# EAGLE board Controller (EAGLE 6.4)
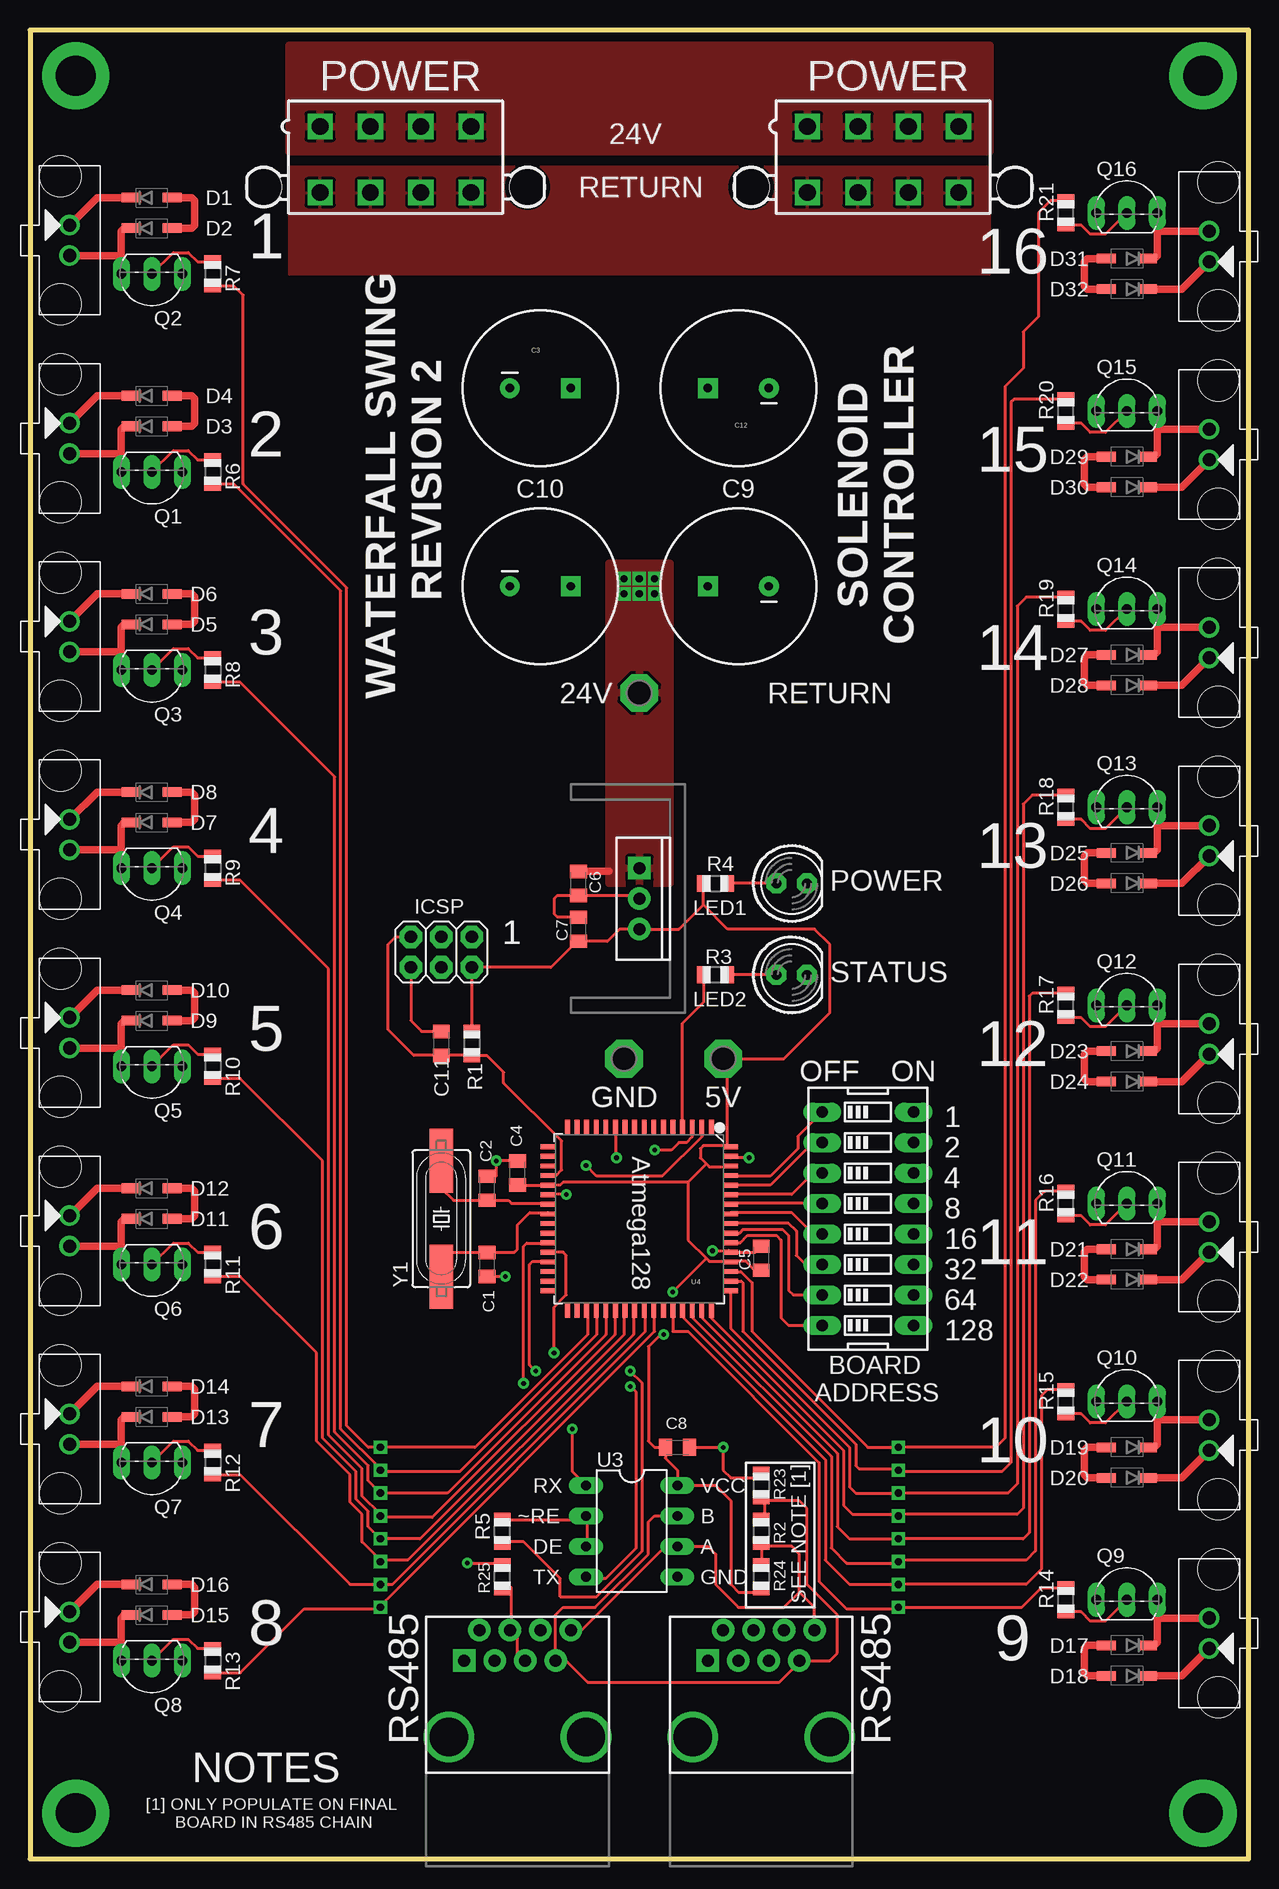
[diagram p0: board, top side]
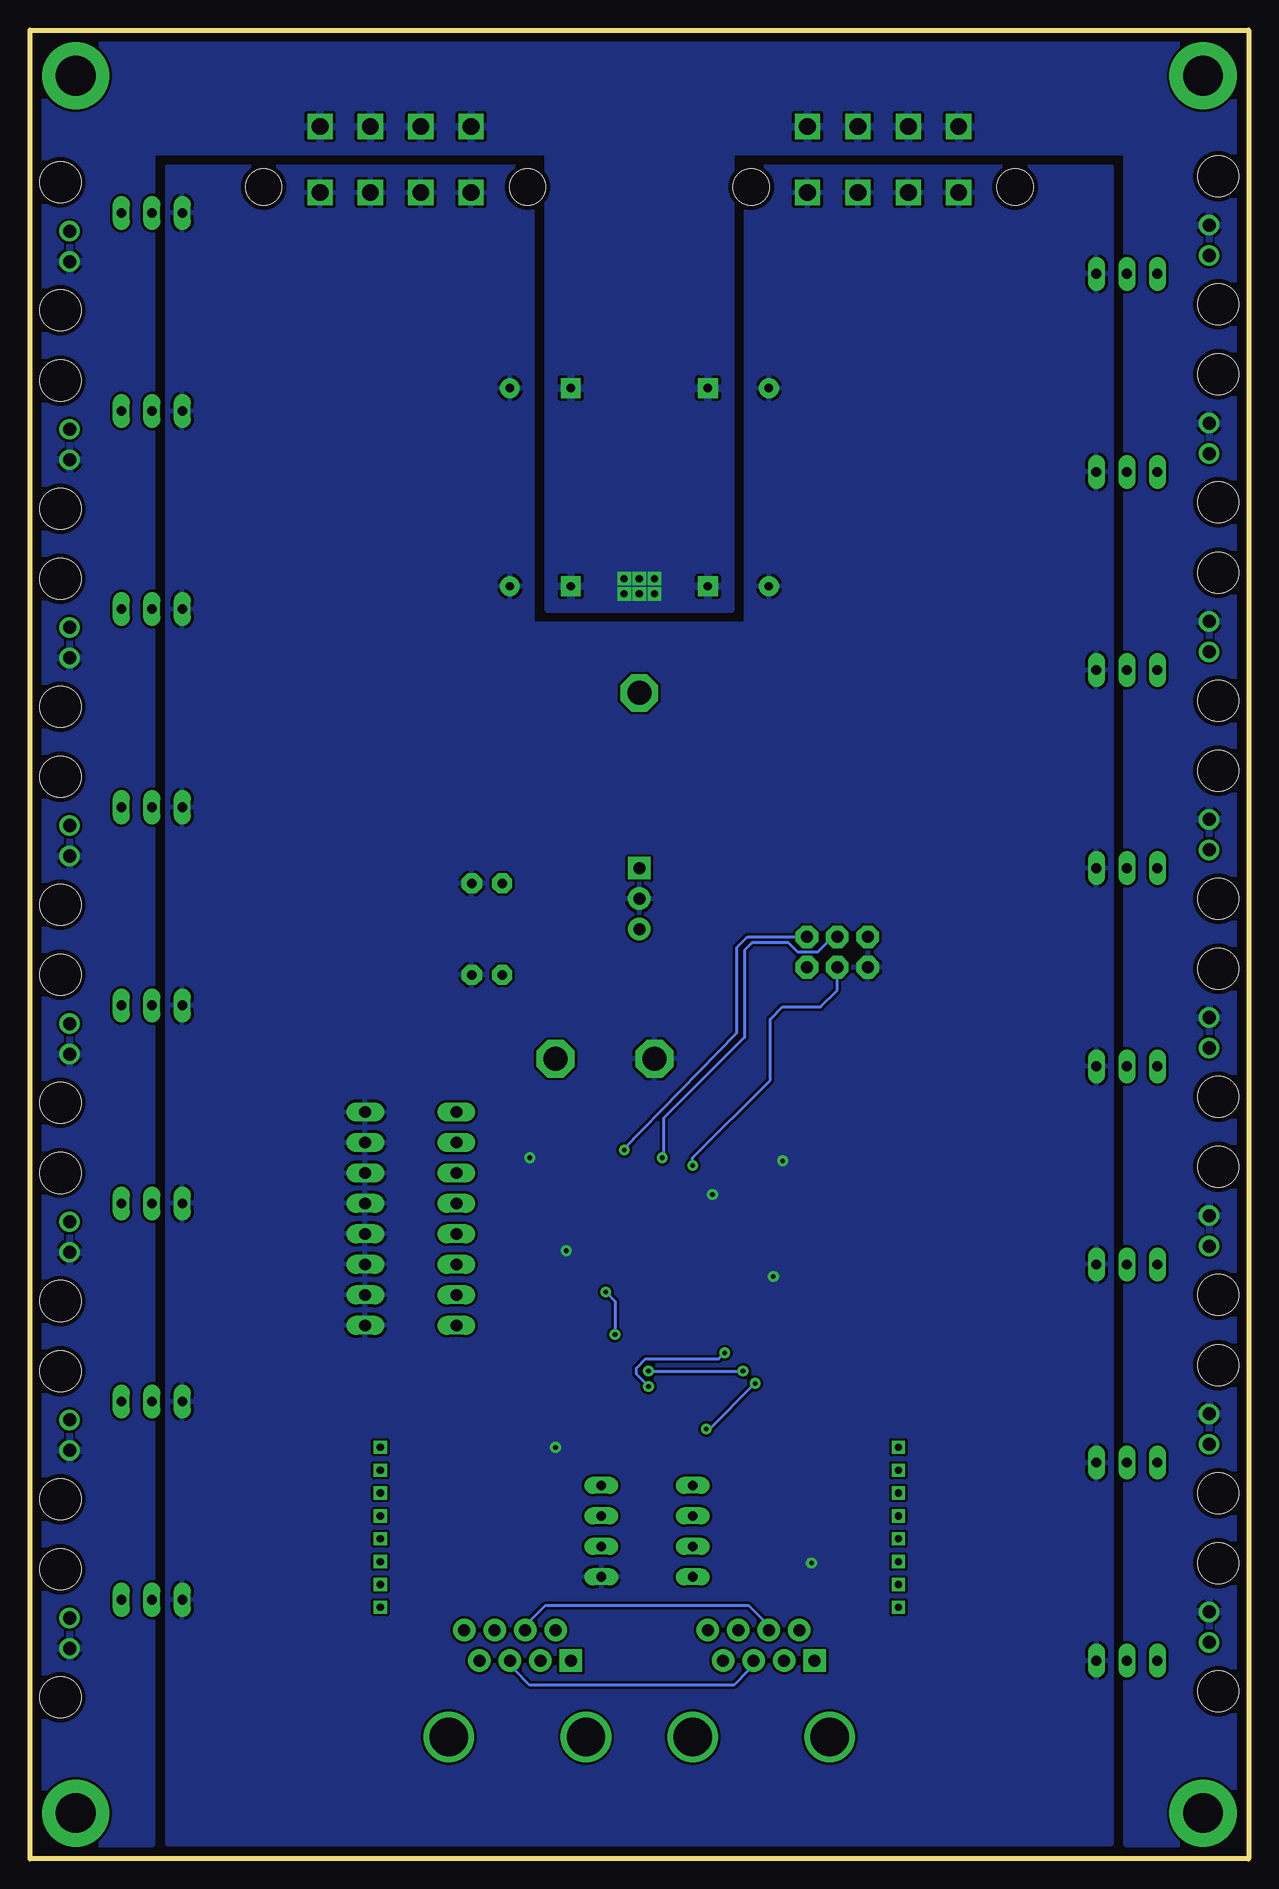
[diagram p1: board, bottom side, seen from below]

Size 101.6 x 152.4 mm. Coordinates in mm from the lower left corner, seen from the top.
Outline: 0,0 101.6,0 101.6,152.4 0,152.4 0,0
Copper layers (1*16): Top 0.035mm / dielectric 1.5mm / Bottom 0.035mm
Design rules "icc-4pcb": minimum track width 10mil, minimum drill 15mil, track to track 8mil, track to pad 8mil, pad to pad 8mil, via to via 8mil, smd to smd 8mil, copper to edge 15mil, drill to drill 8mil, minimum pad ring 12mil, minimum via ring 10mil, stop-mask expansion 4mil, vias tented up to drill 0mil, thermal gap 10mil
Net classes: 0 default: width 0.203 mm; 1 Power: width 0.635 mm

## Footprints (pad centres in the part's own frame; a part is rotated, then mirrored left to right if it is on the bottom)
C0805K = smd 1.1 x 1.4: 1 -1,0; 2 1,0
CPOL-RADIAL-1000UF-35V = drill 0.7 pad 1.651 square: 1 2.54,0 | drill 0.7 pad 1.651: 2 -2.54,0
SOD123 = smd 1.6 x 0.8: 1 -1.7,0; 2 1.7,0
2X03 = drill 1.016 pad 1.88 octagon: 1 -2.54,-1.27; 2 -2.54,1.27; 3 0,-1.27; 4 0,1.27; 5 2.54,-1.27; 6 2.54,1.27
RJ45-8 = drill 1 pad 1.88 square: 1 -4.445,6.35 | drill 1 pad 1.88: 2 -3.175,8.89; 3 -1.905,6.35; 4 -0.635,8.89; 5 0.635,6.35; 6 1.905,8.89; 7 3.175,6.35; 8 4.445,8.89 | drill 3.2 pad 3.556: P$2 -5.715,0; P$3 5.715,0
MOLEX-70545-02POSITION = drill 1.092: P1 6.604,-0.762; P2 4.064,-0.762 | hole 3.404: 0,0; 10.668,0
STAND-OFF = drill 3.302 pad 5.588: P$1 0,0
LED5MM = drill 0.813 pad 1.676 octagon: A -1.27,0; K 1.27,0
TO92-EBC = drill 0.813 long: B 0,-1.27; C 2.54,-1.27; E -2.54,-1.27
R0805 = smd 1.1 x 1.4: 1 -1,0; 2 1,0
DIPSWITCH-08 = drill 0.97 long: 1 -8.89,-3.81; 2 -6.35,-3.81; 3 -3.81,-3.81; 4 -1.27,-3.81; 5 1.27,-3.81; 6 3.81,-3.81; 7 6.35,-3.81; 8 8.89,-3.81; 9 8.89,3.81; 10 6.35,3.81; 11 3.81,3.81; 12 1.27,3.81; 13 -1.27,3.81; 14 -3.81,3.81; 15 -6.35,3.81; 16 -8.89,3.81
P1-20 = drill 2.007 pad 3.15 octagon: TP 0,0
TO220-IGO = drill 1 pad 1.88: GND 0,0; OUT 2.54,0 | drill 1 pad 1.88 square: IN -2.54,0
DIL08 = drill 0.813 long: 1 -3.81,-3.81; 2 -1.27,-3.81; 3 1.27,-3.81; 4 3.81,-3.81; 5 3.81,3.81; 6 1.27,3.81; 7 -1.27,3.81; 8 -3.81,3.81
TQFP64_14X14MM = smd 0.4 x 1.27: 1 -6,-7.6; 2 -5.2,-7.6; 3 -4.4,-7.6; 4 -3.6,-7.6; 5 -2.8,-7.6; 6 -2,-7.6; 7 -1.2,-7.6; 8 -0.4,-7.6; 9 0.4,-7.6; 10 1.2,-7.6; 11 2,-7.6; 12 2.8,-7.6; 13 3.6,-7.6; 14 4.4,-7.6; 15 5.2,-7.6; 16 6,-7.6; 33 6,7.6; 34 5.2,7.6; 35 4.4,7.6; 36 3.6,7.6; 37 2.8,7.6; 38 2,7.6; 39 1.2,7.6; 40 0.4,7.6; 41 -0.4,7.6; 42 -1.2,7.6; 43 -2,7.6; 44 -2.8,7.6; 45 -3.6,7.6; 46 -4.4,7.6; 47 -5.2,7.6; 48 -6,7.6 | smd 1.27 x 0.4: 17 7.6,-6; 18 7.6,-5.2; 19 7.6,-4.4; 20 7.6,-3.6; 21 7.6,-2.8; 22 7.6,-2; 23 7.6,-1.2; 24 7.6,-0.4; 25 7.6,0.4; 26 7.6,1.2; 27 7.6,2; 28 7.6,2.8; 29 7.6,3.6; 30 7.6,4.4; 31 7.6,5.2; 32 7.6,6; 49 -7.6,6; 50 -7.6,5.2; 51 -7.6,4.4; 52 -7.6,3.6; 53 -7.6,2.8; 54 -7.6,2; 55 -7.6,1.2; 56 -7.6,0.4; 57 -7.6,-0.4; 58 -7.6,-1.2; 59 -7.6,-2; 60 -7.6,-2.8; 61 -7.6,-3.6; 62 -7.6,-4.4; 63 -7.6,-5.2; 64 -7.6,-6
5566-8 = drill 1.4 square: 1 6.3,-2.75; 2 2.1,-2.75; 3 -2.1,-2.75; 4 -6.3,-2.75; 5 6.3,2.75; 6 2.1,2.75; 7 -2.1,2.75; 8 -6.3,2.75 | hole 3: 11,2.29; -11,2.29
HC49UP = smd 5.334 x 1.93: 1 -4.826,0; 2 4.826,0

## Placement (x,y rotation side)
C1  33p  [C0805K]  38.1,49.53 270 top
C2  33p  [C0805K]  38.1,55.88 90 top
C3  1000u  [CPOL-RADIAL-1000UF-35V]  42.55,122.56 0 top
C4  .1u  [C0805K]  40.64,57.15 90 top
C5  .1u  [C0805K]  60.96,50.04 90 top
C6  15uF, 25V  [C0805K]  45.72,81.28 270 top
C7  15uF, 25V  [C0805K]  45.72,77.47 90 top
C8  .1u  [C0805K]  53.98,34.29 0 top
C9  1000u  [CPOL-RADIAL-1000UF-35V]  59.05,106.05 180 top
C10  1000u  [CPOL-RADIAL-1000UF-35V]  42.55,106.05 0 top
C11  .1u  [C0805K]  34.29,67.94 90 top
C12  1000u  [CPOL-RADIAL-1000UF-35V]  59.05,122.56 180 top
D1  [SOD123]  10.16,138.43 0 top
D2  [SOD123]  10.16,135.89 0 top
D3  [SOD123]  10.16,119.38 0 top
D4  [SOD123]  10.16,121.92 0 top
D5  [SOD123]  10.16,102.87 0 top
D6  [SOD123]  10.16,105.41 0 top
D7  [SOD123]  10.16,86.36 0 top
D8  [SOD123]  10.16,88.9 0 top
D9  [SOD123]  10.16,69.85 0 top
D10  [SOD123]  10.16,72.39 0 top
D11  [SOD123]  10.16,53.34 0 top
D12  [SOD123]  10.16,55.88 0 top
D13  [SOD123]  10.16,36.83 0 top
D14  [SOD123]  10.16,39.37 0 top
D15  [SOD123]  10.16,20.32 0 top
D16  [SOD123]  10.16,22.86 0 top
D17  [SOD123]  91.44,17.78 180 top
D18  [SOD123]  91.44,15.24 180 top
D19  [SOD123]  91.44,34.29 180 top
D20  [SOD123]  91.44,31.75 180 top
D21  [SOD123]  91.44,50.8 180 top
D22  [SOD123]  91.44,48.26 180 top
D23  [SOD123]  91.44,67.31 180 top
D24  [SOD123]  91.44,64.77 180 top
D25  [SOD123]  91.44,83.82 180 top
D26  [SOD123]  91.44,81.28 180 top
D27  [SOD123]  91.44,100.33 180 top
D28  [SOD123]  91.44,97.79 180 top
D29  [SOD123]  91.44,116.84 180 top
D30  [SOD123]  91.44,114.3 180 top
D31  [SOD123]  91.44,133.35 180 top
D32  [SOD123]  91.44,130.81 180 top
ICSP  [2X03]  34.29,75.56 180 top
J1  RJ45-8PTH  [RJ45-8]  40.64,10.16 0 top
J2  RJ45-8PTH  [RJ45-8]  60.96,10.16 0 top
J3  MOLEX-70545-02POSITION  [MOLEX-70545-02POSITION]  2.54,129.54 90 top
J4  MOLEX-70545-02POSITION  [MOLEX-70545-02POSITION]  2.54,113.03 90 top
J5  MOLEX-70545-02POSITION  [MOLEX-70545-02POSITION]  2.54,96.52 90 top
J6  MOLEX-70545-02POSITION  [MOLEX-70545-02POSITION]  2.54,80.01 90 top
J7  MOLEX-70545-02POSITION  [MOLEX-70545-02POSITION]  2.54,63.5 90 top
J8  MOLEX-70545-02POSITION  [MOLEX-70545-02POSITION]  2.54,46.99 90 top
J9  MOLEX-70545-02POSITION  [MOLEX-70545-02POSITION]  2.54,30.48 90 top
J10  MOLEX-70545-02POSITION  [MOLEX-70545-02POSITION]  2.54,13.97 90 top
J11  MOLEX-70545-02POSITION  [MOLEX-70545-02POSITION]  99.06,24.13 270 top
J12  MOLEX-70545-02POSITION  [MOLEX-70545-02POSITION]  99.06,40.64 270 top
J15  MOLEX-70545-02POSITION  [MOLEX-70545-02POSITION]  99.06,57.15 270 top
J16  MOLEX-70545-02POSITION  [MOLEX-70545-02POSITION]  99.06,73.66 270 top
J17  MOLEX-70545-02POSITION  [MOLEX-70545-02POSITION]  99.06,90.17 270 top
J18  MOLEX-70545-02POSITION  [MOLEX-70545-02POSITION]  99.06,106.68 270 top
J19  MOLEX-70545-02POSITION  [MOLEX-70545-02POSITION]  99.06,123.19 270 top
J20  MOLEX-70545-02POSITION  [MOLEX-70545-02POSITION]  99.06,139.7 270 top
JP1  STAND-OFF  [STAND-OFF]  97.79,3.81 0 top
JP2  STAND-OFF  [STAND-OFF]  3.81,3.81 0 top
JP3  STAND-OFF  [STAND-OFF]  97.79,148.59 0 top
JP4  STAND-OFF  [STAND-OFF]  3.81,148.59 0 top
LED1  [LED5MM]  63.5,81.28 0 top
LED2  [LED5MM]  63.5,73.66 0 top
Q1  [TO92-EBC]  10.16,114.3 180 top
Q2  MPSA27  [TO92-EBC]  10.16,130.81 180 top
Q3  [TO92-EBC]  10.16,97.79 180 top
Q4  [TO92-EBC]  10.16,81.28 180 top
Q5  [TO92-EBC]  10.16,64.77 180 top
Q6  [TO92-EBC]  10.16,48.26 180 top
Q7  [TO92-EBC]  10.16,31.75 180 top
Q8  [TO92-EBC]  10.16,15.24 180 top
Q9  [TO92-EBC]  91.44,22.86 0 top
Q10  [TO92-EBC]  91.44,39.37 0 top
Q11  [TO92-EBC]  91.44,55.88 0 top
Q12  [TO92-EBC]  91.44,72.39 0 top
Q13  [TO92-EBC]  91.44,88.9 0 top
Q14  [TO92-EBC]  91.44,105.41 0 top
Q15  [TO92-EBC]  91.44,121.92 0 top
Q16  [TO92-EBC]  91.44,138.43 0 top
R1  10k  [R0805]  36.83,67.94 270 top
R2  120  [R0805]  60.96,27.3 270 top
R3  1k  [R0805]  57.15,73.66 180 top
R4  1k  [R0805]  57.15,81.28 0 top
R5  1k  [R0805]  39.37,27.3 90 top
R6  10k  [R0805]  15.24,115.57 270 top
R7  10k  [R0805]  15.24,132.08 270 top
R8  10k  [R0805]  15.24,99.06 270 top
R9  10k  [R0805]  15.24,82.55 270 top
R10  10k  [R0805]  15.24,66.04 270 top
R11  10k  [R0805]  15.24,49.53 270 top
R12  10k  [R0805]  15.24,33.02 270 top
R13  10k  [R0805]  15.24,16.51 270 top
R14  10k  [R0805]  86.36,21.59 90 top
R15  10k  [R0805]  86.36,38.1 90 top
R16  10k  [R0805]  86.36,54.61 90 top
R17  10k  [R0805]  86.36,71.12 90 top
R18  10k  [R0805]  86.36,87.63 90 top
R19  10k  [R0805]  86.36,104.14 90 top
R20  10k  [R0805]  86.36,120.65 90 top
R21  10k  [R0805]  86.36,137.16 90 top
R23  560  [R0805]  60.96,31.11 270 top
R24  560  [R0805]  60.96,23.5 270 top
R25  0  [R0805]  39.37,23.5 90 top
SW1  [DIPSWITCH-08]  69.85,53.34 270 top
TP1  PTR1PAD1-20  [P1-20]  50.8,97.16 0 top
TP3  PTR1PAD1-20  [P1-20]  57.78,66.67 0 top
TP4  PTR1PAD1-20  [P1-20]  49.53,66.67 0 top
U2  7805  [TO220-IGO]  50.8,80.01 270 top
U3  SN75176BP  [DIL08]  50.16,27.3 270 top
U4  ATMEGA128-SMD  [TQFP64_14X14MM]  50.8,53.34 180 top
X3  5566-8  [5566-8]  30.48,141.6 180 top
X4  5566-8  [5566-8]  71.12,141.6 180 top
Y1  16MHz  [HC49UP]  34.29,53.34 90 top

## Library data of the parts
C1 C2 C4-C8 C11 LED1 LED2 R1-R21 R23-R25 = adafruit
C3 C9 C10 C12 J1 J2 JP1-JP4 U3 = custom
D1-D32 = semicon-smd-ipc
ICSP U2 = SparkFun
J3-J12 J15-J20 = icc
Q1-Q16 = transistor-neu-to92
SW1 = SparkFun-Electromechanical
TP1 TP3 TP4 = testpad
U4 = SparkFun-DigitalIC
X3 X4 = con-molex; OC_FARNELL: unknown; OC_NEWARK: unknown
Y1 = crystal

## Nets
5V: C4.1 C5.1 C7.1 C8.1 ICSP.2 R1.1 R4.1 R24.2 TP3.TP U2.OUT U3.8 U4.21 U4.52 U4.62 U4.64
A: J1.8 J2.8 R2.2 R24.1 U3.6
B: J1.7 J2.7 R2.1 R23.2 U3.7
GND: C1.2 C2.2 C3.2 C4.2 C5.2 C6.2 C7.2 C8.2 C9.2 C10.2 C11.2 C12.2 ICSP.6 LED1.K LED2.K Q1.E Q2.E Q3.E Q4.E Q5.E Q6.E Q7.E Q8.E Q9.E Q10.E Q11.E Q12.E Q13.E Q14.E Q15.E Q16.E R23.1 R25.2 SW1.9 SW1.10 SW1.11 SW1.12 SW1.13 SW1.14 SW1.15 SW1.16 TP4.TP U2.GND U3.5 U4.22 U4.53 U4.63 X3.5 X3.6 X3.7 X3.8 X4.5 X4.6 X4.7 X4.8
MISO: ICSP.1 U4.3
MOSI: ICSP.4 U4.2
N$1: U3.1 U4.27
N$3: R3.2 U4.4
N$4: U3.4 U4.28
N$5: C2.1 U4.23 Y1.2
N$6: C1.1 U4.24 Y1.1
N$7: LED1.A R4.2
N$8: LED2.A R3.1
N$9: Q1.B R6.1
N$11: Q2.B R7.1
N$12: R5.2 U3.2 U3.3
N$13 [Power]: D3.1 J4.P2 Q1.C
N$14 [Power]: D2.1 J3.P2 Q2.C
N$16 [Power]: D9.2 D10.2
N$17 [Power]: D1.2 D2.2
N$18: Q3.B R8.1
N$19 [Power]: D5.1 J5.P2 Q3.C
N$20 [Power]: D17.2 D18.2
N$21: Q4.B R9.1
N$22 [Power]: D7.1 J6.P2 Q4.C
N$23 [Power]: D25.2 D26.2
N$24: Q5.B R10.1
N$25 [Power]: D9.1 J7.P2 Q5.C
N$26 [Power]: D27.2 D28.2
N$27: Q6.B R11.1
N$28 [Power]: D11.1 J8.P2 Q6.C
N$29 [Power]: D19.2 D20.2
N$30: Q7.B R12.1
N$31 [Power]: D13.1 J9.P2 Q7.C
N$32 [Power]: D11.2 D12.2
N$33: Q8.B R13.1
N$34 [Power]: D15.1 J10.P2 Q8.C
N$35 [Power]: D3.2 D4.2
N$36: Q9.B R14.1
N$37 [Power]: D17.1 J11.P2 Q9.C
N$38 [Power]: D5.2 D6.2
N$39: Q10.B R15.1
N$40 [Power]: D19.1 J12.P2 Q10.C
N$41 [Power]: D13.2 D14.2
N$42: Q11.B R16.1
N$43 [Power]: D21.1 J15.P2 Q11.C
N$44 [Power]: D21.2 D22.2
N$45: Q12.B R17.1
N$46 [Power]: D23.1 J16.P2 Q12.C
N$47 [Power]: D29.2 D30.2
N$48: Q13.B R18.1
N$49 [Power]: D25.1 J17.P2 Q13.C
N$50 [Power]: D31.2 D32.2
N$51: Q14.B R19.1
N$52 [Power]: D27.1 J18.P2 Q14.C
N$53 [Power]: D23.2 D24.2
N$54: Q15.B R20.1
N$55 [Power]: D29.1 J19.P2 Q15.C
N$56 [Power]: D15.2 D16.2
N$57: Q16.B R21.1
N$58 [Power]: D31.1 J20.P2 Q16.C
N$59 [Power]: D7.2 D8.2
N$60: J1.4 J1.5 J2.4 J2.5 R25.1
N$61: SW1.1 U4.61
N$62: SW1.2 U4.60
N$63: SW1.3 U4.59
N$64: SW1.4 U4.58
N$65: SW1.5 U4.57
N$66: SW1.6 U4.56
N$67: SW1.7 U4.55
N$68: SW1.8 U4.54
N$70: R5.1 U4.29
NRESET: C11.1 ICSP.5 R1.2 U4.20
SCK: ICSP.3 U4.11
V+ [Power]: C3.1 C6.1 C9.1 C10.1 C12.1 D1.1 D4.1 D6.1 D8.1 D10.1 D12.1 D14.1 D16.1 D18.1 D20.1 D22.1 D24.1 D26.1 D28.1 D30.1 D32.1 J3.P1 J4.P1 J5.P1 J6.P1 J7.P1 J8.P1 J9.P1 J10.P1 J11.P1 J12.P1 J15.P1 J16.P1 J17.P1 J18.P1 J19.P1 J20.P1 TP1.TP U2.IN X3.1 X3.2 X3.3 X3.4 X4.1 X4.2 X4.3 X4.4
VALVE1: R7.2 U4.35
VALVE2: R6.2 U4.36
VALVE3: R8.2 U4.37
VALVE4: R9.2 U4.38
VALVE5: R10.2 U4.39
VALVE6: R11.2 U4.40
VALVE7: R12.2 U4.41
VALVE8: R13.2 U4.42
VALVE9: R14.2 U4.44
VALVE10: R15.2 U4.45
VALVE11: R16.2 U4.46
VALVE12: R17.2 U4.47
VALVE13: R18.2 U4.48
VALVE14: R19.2 U4.49
VALVE15: R20.2 U4.50
VALVE16: R21.2 U4.51

## Tracks (layer width: path | path; a pad name or v marks a point on that pad's centre or on a via)
5V  (via drill 0.38)
  Top 0.254: 56.13,79.5 56.13,81.28 R4.1 | 56.13,79.5 54.1,77.47 U2.OUT 49.15,77.47 48.13,76.45 45.74,76.45 C7.1 45.61,76.47 43.43,74.3 ICSP.2 R1.1 | C5.1 60.96,49.02 60.45,49.02 59.69,49.78 58.42,49.78 U4.52 58.17,49.78 56.64,49.78 56.39,50.04 | C4.1 40.64,56.13 43.18,56.13 U4.21 43.43,56.13 44.2,56.13 44.45,56.39 54.86,56.39 | 56.39,57.91 55.88,58.42 55.88,59.18 56.13,59.44 57.91,59.44 | 56.39,57.91 56.64,57.66 58.17,57.66 U4.62 | 58.17,59.44 57.91,59.44 | 58.17,59.44 U4.64 57.91,59.44 | 56.39,57.91 54.86,56.39 | 56.39,50.04 54.86,51.56 54.86,56.39 | 57.91,66.55 TP3.TP | v52.83,43.69 52.58,43.69 51.56,42.67 51.56,34.8 52.07,34.29 C8.1 52.98,33.38 53.98,32.38 U3.8 57.15,31.11 58.42,29.84 58.42,22.86 59.05,22.23 60.69,22.23 R24.2 | 56.39,50.04 v53.59,47.24 | 58.17,59.44 58.17,66.29 TP3.TP | TP3.TP 62.87,66.67 66.67,70.48 66.67,76.2 65.41,77.47 58.17,77.47 56.13,79.5
  Bottom 0.254: v52.83,43.69 52.83,46.48 v53.59,47.24
A
  Top 0.254: R24.1 R2.2 61.23,26.04 63.5,26.04 64.14,25.4 64.14,22.23 | J2.8 65.41,20.95 64.14,22.23 | 64.14,22.23 62.87,20.95 59.05,20.95 57.15,22.86 57.15,25.4 56.52,26.04 U3.6 52.96,26.04 45.97,19.05 J1.8
B
  Top 0.254: 61.23,29.84 64.14,29.84 64.77,29.21 64.77,22.86 67.31,20.32 67.31,17.14 66.67,16.51 J2.7 64.01,16.51 64.01,16.26 | 61.23,29.84 R23.2 | 61.23,29.84 61.23,28.57 R2.1 | U3.7 52.07,28.57 51.56,28.07 51.56,25.4 47.12,20.95 44.45,20.95 43.81,20.32 J1.7 44.7,16.51 46.48,14.73 62.48,14.73 64.01,16.26 | 64.01,16.26 64.14,16.38
GND  (via drill 0.38)
  Top 0.254: 38.86,57.91 38.86,56.9 38.1,56.9 C2.2 | 38.86,57.91 39.12,58.17 40.64,58.17 C4.2 | 45.72,80.26 43.94,80.26 43.69,80.01 43.69,78.74 43.94,78.49 45.72,78.49 C7.2 | v44.7,55.37 43.43,55.37 U4.22 | v59.94,58.42 58.42,58.42 U4.63 | v39.62,48.51 38.1,48.51 C1.2 | 45.72,80.26 50.55,80.26 U2.GND | 45.72,80.26 C6.2 | v38.86,58.17 38.86,57.91 | ICSP.6 31.75,69.85 32.64,68.96 34.27,68.96 C11.2 | v56.9,50.67 58.27,50.67 U4.53 60.46,50.54 C5.2 | C8.2 v57.78,34.29 57.78,32.38 58.42,31.75 60.59,31.75 R23.1 | v36.45,24.64 39.23,24.64 R25.2
  pour Bottom: 11.43,1.27 11.43,140.97 41.91,140.97 41.91,102.87 59.69,102.87 59.69,140.97 90.17,140.97 90.17,1.27 77.47,1.27 24.13,1.27
  pour Top: 21.59,140.97 21.59,132.08 80.01,132.08 80.01,140.97
MISO  (via drill 0.38)
  Top 0.254: U4.3 55.2,60.15 54.74,59.69 54.1,59.69 53.47,59.05 v52.07,59.05
  Bottom 0.254: v52.07,59.05 52.07,59.18 42.67,68.83 42.67,75.95 41.78,76.83 ICSP.1
MOSI  (via drill 0.38)
  Top 0.254: U4.2 56,60.19 52.7,56.9 47.24,56.9 v46.35,57.78
  Bottom 0.254: v46.35,57.78 46.35,58.42 39.88,64.9 39.88,69.98 38.86,70.99 35.69,70.99 34.29,72.39 ICSP.4
N$1  (via drill 0.38)
  Top 0.254: v41.15,39.62 41.15,51.05 41.4,51.31 43.18,51.31 U4.27 | v45.21,35.81 45.21,32.26 U3.1
  Bottom 0.254: v41.15,39.62 44.96,35.81 v45.21,35.81
N$3
  Top 0.254: U4.4 54.36,60.96 54.36,69.6 56.13,71.37 56.13,73.66 R3.2
N$4  (via drill 0.38)
  Top 0.254: v43.69,42.16 43.69,45.97 44.7,46.99 44.7,50.29 44.45,50.55 43.43,50.55 U4.28 | v50.04,39.37 50.55,38.86 50.55,25.91 48.01,23.37 46.48,23.37 U3.4
  Bottom 0.254: v43.69,42.16 44.2,41.66 50.29,41.66 51.05,40.89 51.05,40.39 v50.04,39.37
N$5
  Top 0.254: 38.1,54.86 39.88,54.86 40.13,54.61 43.18,54.61 U4.23 | 38.1,54.86 35.31,54.86 34.29,55.88 Y1.2 | 38.1,54.86 C2.1
N$6
  Top 0.254: 38.1,50.55 40.39,50.55 40.64,50.8 40.64,52.83 41.66,53.85 43.18,53.85 U4.24 | 38.1,50.55 34.54,50.55 34.29,50.29 Y1.1 | 38.1,50.55 C1.1
N$7
  Top 0.254: LED1.A R4.2
N$8
  Top 0.254: LED2.A R3.1
N$9
  Top 0.254: Q1.B 11.94,117.35 13.21,117.35 13.97,116.59 15.24,116.59 R6.1
N$11
  Top 0.254: Q2.B 11.94,133.86 13.21,133.86 13.97,133.1 15.24,133.1 R7.1
N$12
  Top 0.254: 46.48,28.19 46.48,26.16 U3.3 | 46.48,28.19 46.48,28.45 U3.2 46.48,28.19 | 46.48,28.19 39.37,28.19 R5.2
N$13
  Top 0.635: D3.1 7.87,119.38 7.62,119.13 7.62,117.09 | Q1.C 7.62,117.09 | 7.62,117.09 J4.P2
N$14
  Top 0.635: D2.1 7.87,135.89 7.62,135.64 7.62,133.6 | Q2.C 7.62,133.6 | 7.62,133.6 J3.P2
N$16
  Top 0.635: D9.2 13.46,69.85 13.72,70.1 13.72,72.14 13.46,72.39 D10.2
N$17
  Top 0.635: D2.2 13.46,135.89 13.72,136.14 13.72,138.18 13.46,138.43 D1.2
N$18
  Top 0.254: Q3.B 11.94,100.84 13.21,100.84 13.97,100.08 15.24,100.08 R8.1
N$19
  Top 0.635: D5.1 7.87,102.87 7.62,102.62 7.62,100.58 | Q3.C 7.62,100.58 | 7.62,100.58 J5.P2
N$20
  Top 0.635: D18.2 88.14,15.24 87.88,15.49 87.88,17.53 88.14,17.78 D17.2
N$21
  Top 0.254: Q4.B 11.94,84.33 13.21,84.33 13.97,83.57 15.24,83.57 R9.1
N$22
  Top 0.635: D7.1 7.87,86.36 7.62,86.11 7.62,84.07 | Q4.C 7.62,84.07 | 7.62,84.07 J6.P2
N$23
  Top 0.635: D26.2 88.14,81.28 87.88,81.53 87.88,83.57 88.14,83.82 D25.2
N$24
  Top 0.254: Q5.B 11.94,67.82 13.21,67.82 13.97,67.06 15.24,67.06 R10.1
N$25
  Top 0.635: D9.1 7.87,69.85 7.62,69.6 7.62,67.56 | Q5.C 7.62,67.56 | 7.62,67.56 J7.P2
N$26
  Top 0.635: D28.2 88.14,97.79 87.88,98.04 87.88,100.08 88.14,100.33 D27.2
N$27
  Top 0.254: Q6.B 11.94,51.31 13.21,51.31 13.97,50.55 15.24,50.55 R11.1
N$28
  Top 0.635: D11.1 7.87,53.34 7.62,53.09 7.62,51.05 | Q6.C 7.62,51.05 | 7.62,51.05 J8.P2
N$29
  Top 0.635: D20.2 88.14,31.75 87.88,32 87.88,34.04 88.14,34.29 D19.2
N$30
  Top 0.254: Q7.B 11.94,34.8 13.21,34.8 13.97,34.04 15.24,34.04 R12.1
N$31
  Top 0.635: D13.1 7.87,36.83 7.62,36.58 7.62,34.54 | Q7.C 7.62,34.54 | 7.62,34.54 J9.P2
N$32
  Top 0.635: D11.2 13.46,53.34 13.72,53.59 13.72,55.63 13.46,55.88 D12.2
N$33
  Top 0.254: Q8.B 11.94,18.29 13.21,18.29 13.97,17.53 15.24,17.53 R13.1
N$34
  Top 0.635: D15.1 7.87,20.32 7.62,20.07 7.62,18.03 | Q8.C 7.62,18.03 | 7.62,18.03 J10.P2
N$35
  Top 0.635: D3.2 13.46,119.38 13.72,119.63 13.72,121.67 13.46,121.92 D4.2
N$36
  Top 0.254: Q9.B 89.66,19.81 88.39,19.81 87.63,20.57 86.36,20.57 R14.1
N$37
  Top 0.635: D17.1 93.73,17.78 93.98,18.03 93.98,20.07 | Q9.C 93.98,20.07 | 93.98,20.07 J11.P2
N$38
  Top 0.635: D5.2 13.46,102.87 13.72,103.12 13.72,105.16 13.46,105.41 D6.2
N$39
  Top 0.254: Q10.B 89.66,36.32 88.39,36.32 87.63,37.08 86.36,37.08 R15.1
N$40
  Top 0.635: D19.1 93.73,34.29 93.98,34.54 93.98,36.58 | Q10.C 93.98,36.58 | 93.98,36.58 J12.P2
N$41
  Top 0.635: D13.2 13.46,36.83 13.72,37.08 13.72,39.12 13.46,39.37 D14.2
N$42
  Top 0.254: Q11.B 89.66,52.83 88.39,52.83 87.63,53.59 86.36,53.59 R16.1
N$43
  Top 0.635: D21.1 93.73,50.8 93.98,51.05 93.98,53.09 | Q11.C 93.98,53.09 | 93.98,53.09 J15.P2
N$44
  Top 0.635: D22.2 88.14,48.26 87.88,48.51 87.88,50.55 88.14,50.8 D21.2
N$45
  Top 0.254: Q12.B 89.66,69.34 88.39,69.34 87.63,70.1 86.36,70.1 R17.1
N$46
  Top 0.635: D23.1 93.73,67.31 93.98,67.56 93.98,69.6 | Q12.C 93.98,69.6 | 93.98,69.6 J16.P2
N$47
  Top 0.635: D30.2 88.14,114.3 87.88,114.55 87.88,116.59 88.14,116.84 D29.2
N$48
  Top 0.254: Q13.B 89.66,85.85 88.39,85.85 87.63,86.61 86.36,86.61 R18.1
N$49
  Top 0.635: D25.1 93.73,83.82 93.98,84.07 93.98,86.11 | Q13.C 93.98,86.11 | 93.98,86.11 J17.P2
N$50
  Top 0.635: D32.2 88.14,130.81 87.88,131.06 87.88,133.1 88.14,133.35 D31.2
N$51
  Top 0.254: Q14.B 89.66,102.36 88.39,102.36 87.63,103.12 86.36,103.12 R19.1
N$52
  Top 0.635: D27.1 93.73,100.33 93.98,100.58 93.98,102.62 | Q14.C 93.98,102.62 | 93.98,102.62 J18.P2
N$53
  Top 0.635: D24.2 88.14,64.77 87.88,65.02 87.88,67.06 88.14,67.31 D23.2
N$54
  Top 0.254: Q15.B 89.66,118.87 88.39,118.87 87.63,119.63 86.36,119.63 R20.1
N$55
  Top 0.635: D29.1 93.73,116.84 93.98,117.09 93.98,119.13 | Q15.C 93.98,119.13 | 93.98,119.13 J19.P2
N$56
  Top 0.635: D15.2 13.46,20.32 13.72,20.57 13.72,22.61 13.46,22.86 D16.2
N$57
  Top 0.254: Q16.B 89.66,135.38 88.39,135.38 87.63,136.14 86.36,136.14 R21.1
N$58
  Top 0.635: D31.1 93.73,133.35 93.98,133.6 93.98,135.64 | Q16.C 93.98,135.64 | 93.98,135.64 J20.P2
N$59
  Top 0.635: D7.2 13.46,86.36 13.72,86.61 13.72,88.65 13.46,88.9 D8.2
N$60
  Top 0.254: 40.13,19.05 40.13,22.61 39.37,22.61 R25.1 | 40.13,19.05 40.64,18.54 40.64,17.02 41.15,16.51 J1.5 | 40.13,19.05 J1.4
  Bottom 0.254: J1.5 41.66,16.51 41.66,15.75 42.93,14.48 59.94,14.48 61.21,15.75 61.47,15.75 61.47,16.51 J2.5 | J1.4 40.39,19.05 40.39,19.81 41.66,21.08 58.67,21.08 59.94,19.81 60.2,19.81 60.2,19.05 J2.4
N$61
  Top 0.254: SW1.1 64.01,60.2 64.01,59.18 61.72,56.9 58.42,56.9 U4.61
N$62
  Top 0.254: SW1.2 65.28,59.69 61.72,56.13 58.42,56.13 U4.60
N$63
  Top 0.254: SW1.3 65.28,57.15 63.5,55.37 58.42,55.37 U4.59
N$64
  Top 0.254: SW1.4 58.42,54.61 U4.58
N$65
  Top 0.254: SW1.5 65.28,52.07 63.5,53.85 58.42,53.85 U4.57
N$66
  Top 0.254: U4.56 58.42,52.96 63.25,52.96 63.88,52.32 63.88,50.29 64.64,49.53 SW1.6
N$67
  Top 0.254: U4.55 59.12,52.14 59.44,52.45 62.74,52.45 63.25,51.94 63.25,47.37 63.63,46.99 SW1.7
N$68
  Top 0.254: U4.54 59.21,51.34 59.82,51.94 62.23,51.94 62.61,51.56 62.61,45.09 63.25,44.45 SW1.8
N$70  (via drill 0.38)
  Top 0.254: v42.16,40.64 41.66,41.15 41.66,49.53 41.91,49.78 43.18,49.78 U4.29 | v50.04,40.64 51.05,39.62 51.05,25.65 47.24,21.84 44.2,21.84 44.2,23.37 41.15,26.42 39.37,26.42 R5.1
  Bottom 0.254: v50.04,40.64 v42.16,40.64
NRESET
  Top 0.254: U4.20 43.86,56.94 44.32,57.4 44.32,59.82 39.5,64.64 39.5,65.53 38.1,66.93 36.85,66.93 R1.2 C11.1 31.99,66.94 29.84,69.09 29.84,76.2 30.48,76.83 ICSP.5
SCK  (via drill 0.38)
  Top 0.254: U4.11 48.8,58.52 v48.9,58.42
  Bottom 0.254: ICSP.3 34.67,76.83 35.94,75.56 37.59,75.56 38.35,76.33 41.4,76.33 42.04,75.69 42.04,68.45 48.77,61.72 48.77,58.55 v48.9,58.42
V+  (via drill 0.6)
  Top 0.635: 48.26,82.3 45.72,82.3 C6.1 | D16.1 5.59,22.86 J10.P1 | D14.1 5.59,39.37 J9.P1 | D12.1 5.59,55.88 J8.P1 | D10.1 5.59,72.39 J7.P1 | D8.1 5.59,88.9 J6.P1 | D18.1 96.01,15.24 J11.P1 | D6.1 5.59,105.41 J5.P1 | D20.1 96.01,31.75 J12.P1 | D4.1 5.59,121.92 J4.P1 | D22.1 96.01,48.26 J15.P1 | D1.1 5.59,138.43 J3.P1 | D24.1 96.01,64.77 J16.P1 | D26.1 96.01,81.28 J17.P1 | D28.1 96.01,97.79 J18.P1 | D30.1 96.01,114.3 J19.P1 | D32.1 96.01,130.81 J20.P1
  other vias: 49.53,106.68 50.8,106.68 52.07,106.68 49.53,105.41 50.8,105.41 52.07,105.41
  pour Bottom: 1.27,151.13 100.33,151.13 100.33,1.27 91.44,1.27 91.44,142.24 58.42,142.24 58.42,104.14 43.18,104.14 43.18,142.24 10.16,142.24 10.16,1.27 1.27,1.27
  pour Top: 53.34,81.28 53.34,107.95 48.26,107.95 48.26,81.28
  pour Top: 21.59,142.24 arc1 21.59,151.13 80.01,151.13 80.01,142.24
VALVE1  (via drill 0.6)
  Top 0.254: U4.35 46.48,45.72 46.48,43.69 37.08,34.29 v29.21,34.29 28.19,34.29 26.42,36.07 26.42,105.92 17.78,114.55 17.78,130.3 17.02,131.06 15.24,131.06 R7.2
VALVE2  (via drill 0.6)
  Top 0.254: U4.36 47.24,45.72 47.24,43.69 35.81,32.26 29.21,32.26 v29.21,32.38 29.21,32.51 25.91,35.81 25.91,105.66 17.02,114.55 15.24,114.55 R6.2
VALVE3  (via drill 0.6)
  Top 0.254: U4.37 48.01,45.72 48.01,43.69 34.8,30.48 v29.21,30.48 28.19,31.5 28.19,32.77 25.4,35.56 25.4,90.17 17.53,98.04 15.24,98.04 R8.2
VALVE4  (via drill 0.6)
  Top 0.254: U4.38 48.77,45.72 48.77,43.69 33.53,28.45 29.21,28.45 v29.21,28.57 29.21,28.7 27.69,30.23 27.69,32.51 24.89,35.31 24.89,74.17 17.53,81.53 15.24,81.53 R9.2
VALVE5  (via drill 0.6)
  Top 0.254: U4.39 49.53,45.72 49.53,43.69 32.51,26.67 v29.21,26.67 28.19,27.69 28.19,28.96 27.18,29.97 27.18,32.26 24.38,35.05 24.38,58.17 17.53,65.02 15.24,65.02 R10.2
VALVE6  (via drill 0.6)
  Top 0.254: 29.21,24.89 31.5,24.89 50.29,43.69 50.29,45.72 U4.40 | 29.21,24.89 27.69,26.42 27.69,28.7 26.67,29.72 26.67,32 23.88,34.8 23.88,42.16 17.53,48.51 15.24,48.51 R11.2 | 29.21,24.89 v29.21,24.77
VALVE7  (via drill 0.6)
  Top 0.254: R12.2 15.24,32 17.53,32 26.67,22.86 v29.21,22.86 30.23,22.86 51.31,43.94 51.31,45.72 U4.41
VALVE8  (via drill 0.6)
  Top 0.254: R13.2 15.24,15.49 17.53,15.49 22.86,20.83 29.21,20.83 v29.21,20.95 29.21,21.08 52.07,43.94 52.07,45.72 U4.42
VALVE9  (via drill 0.6)
  Top 0.254: U4.44 53.59,43.94 54.86,43.94 65.79,33.02 65.79,23.11 68.07,20.83 72.26,20.83 v72.39,20.95 82.68,20.95 84.33,22.61 86.34,22.61 R14.2
VALVE10  (via drill 0.6)
  Top 0.254: U4.45 54.4,45.17 66.29,33.27 66.29,24.89 68.33,22.86 v72.39,22.86 83.06,22.86 84.33,24.13 84.33,38.61 84.82,39.1 R15.2
VALVE11  (via drill 0.6)
  Top 0.254: U4.46 55.2,45.13 66.8,33.53 66.8,25.91 68.07,24.64 71.88,24.64 | 71.88,24.64 72.26,24.64 v72.39,24.77 | R16.2 84.57,55.61 83.82,54.86 83.82,25.65 83.06,24.89 72.14,24.89 71.88,24.64
VALVE12  (via drill 0.6)
  Top 0.254: U4.47 56,45.09 67.31,33.78 67.31,27.69 68.33,26.67 v72.39,26.67 82.8,26.67 83.31,27.18 83.31,71.88 83.55,72.12 R17.2
VALVE13  (via drill 0.6)
  Top 0.254: U4.48 56.8,45.05 67.82,34.04 67.82,29.46 68.58,28.7 72.26,28.7 | 72.26,28.7 v72.39,28.57 | R18.2 83.55,88.63 82.8,87.88 82.8,29.21 82.3,28.7 72.26,28.7
VALVE14  (via drill 0.6)
  Top 0.254: U4.49 58.4,44.22 68.33,34.29 68.33,30.99 68.83,30.48 v72.39,30.48 81.53,30.48 82.3,31.24 82.3,104.39 83.04,105.14 R19.2
VALVE15  (via drill 0.6)
  Top 0.254: U4.50 59.3,48.14 59.44,48.01 59.44,43.94 68.83,34.54 68.83,32.77 69.09,32.51 72.26,32.51 v72.39,32.38 72.52,32.26 81.03,32.26 81.79,33.02 81.79,121.41 82.03,121.65 R20.2
VALVE16  (via drill 0.6)
  Top 0.254: U4.51 59.26,48.94 60.2,48.01 60.2,43.94 69.85,34.29 v72.39,34.29 80.52,34.29 81.28,35.05 81.28,122.68 82.8,124.21 82.8,127.25 84.07,128.52 84.07,137.16 85.07,138.16 R21.2

## Text on the board
tPlace: POWER | POWER | 24V | RETURN | 1 | 16 | 2 | 15 | WATERFALL SWING / REVISION 2 | SOLENOID / CONTROLLER | 3 | 14 | 24V | RETURN | 4 | 13 | POWER | 1 | STATUS | 5 | 12 | OFF | ON | GND | 5V | 1 | • | Atmega128 | 2 | 4 | 6 | 8 | 16 | 11 | 32 | 64 | 128 | BOARD / ADDRESS | 7 | 10 | RX | VCC | ~RE | B | SEE NOTE [1] | DE | A | TX | GND | 8 | 9 | RS485 | RS485 | NOTES | [1] ONLY POPULATE ON FINAL / BOARD IN RS485 CHAIN